# Altium PCB PCB1.PcbDoc
Units mm, origin at the board's own origin, x right, y up, seen from the top; angles counter-clockwise.
Board outline 152.4 x 101.6 mm, 4 copper layers (Top Layer, Int1 (GND), Int2 (PWR), Bottom Layer), stack 1.369 mm thick; 73 components, 38 nets, 237 pads, 0 vias.
Unrouted connection lines stored in the file: 137.
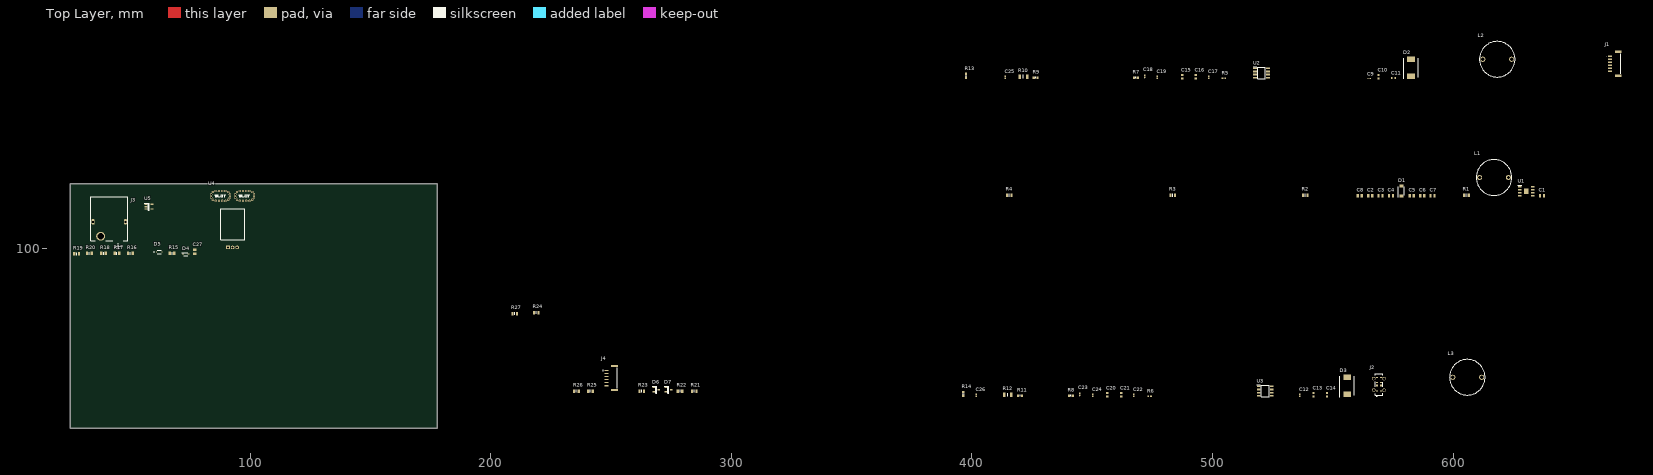
[diagram p0: Top Layer view]
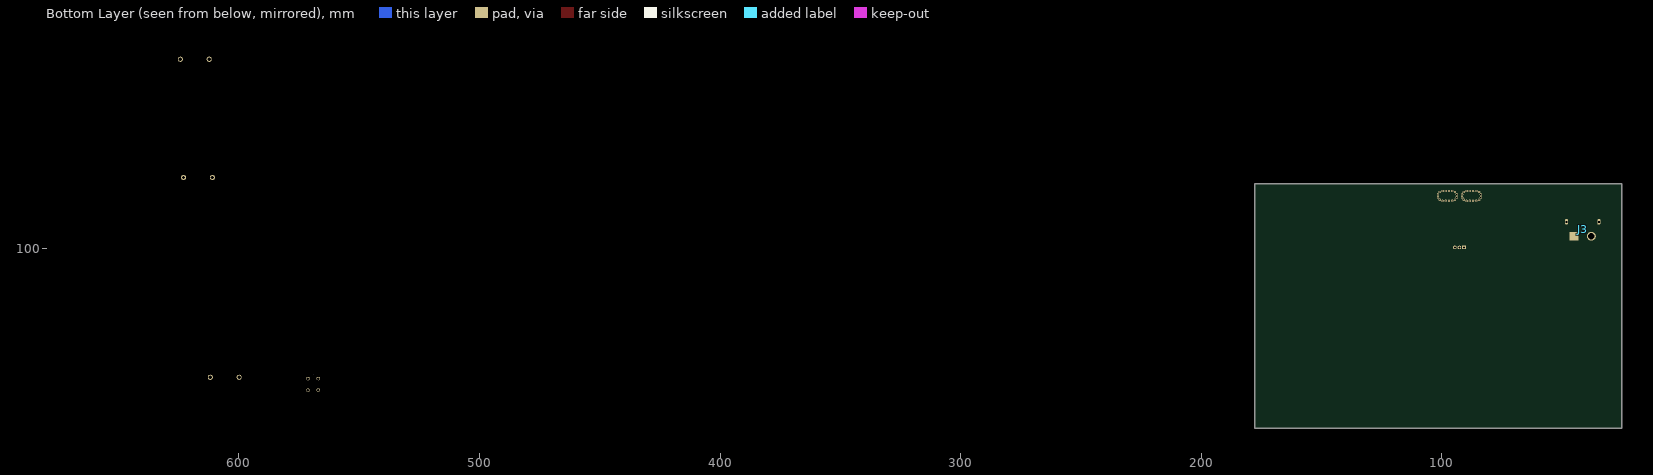
[diagram p1: Bottom Layer view, seen from below]
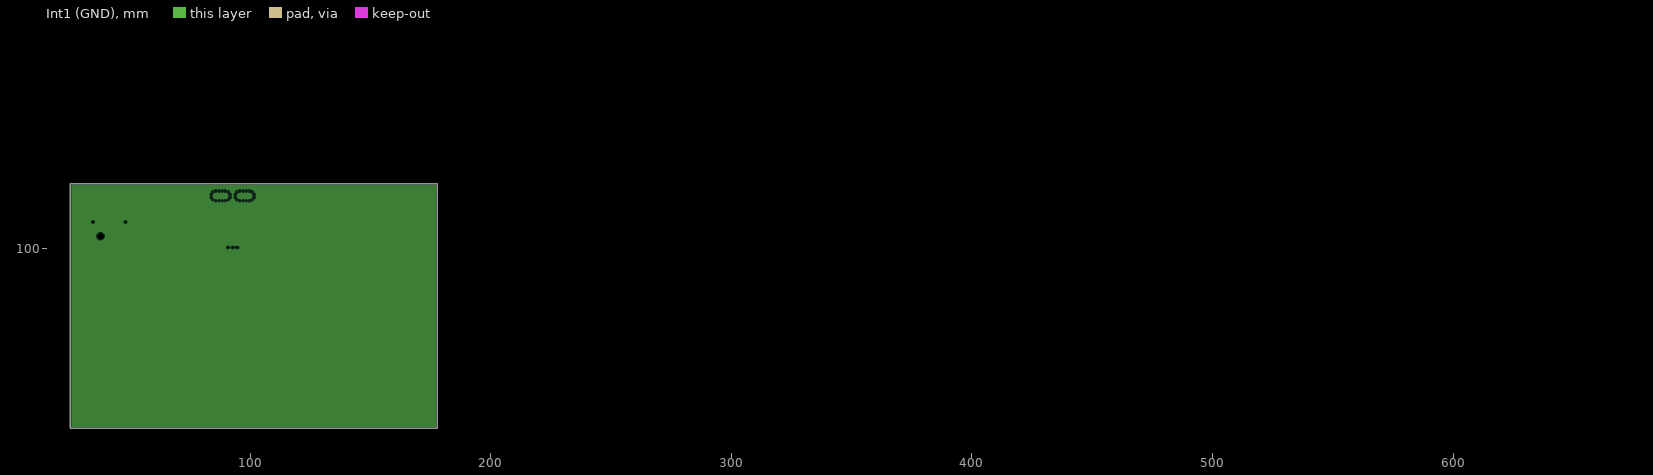
[diagram p2: Int1 (GND), clearances drawn from the general rule]
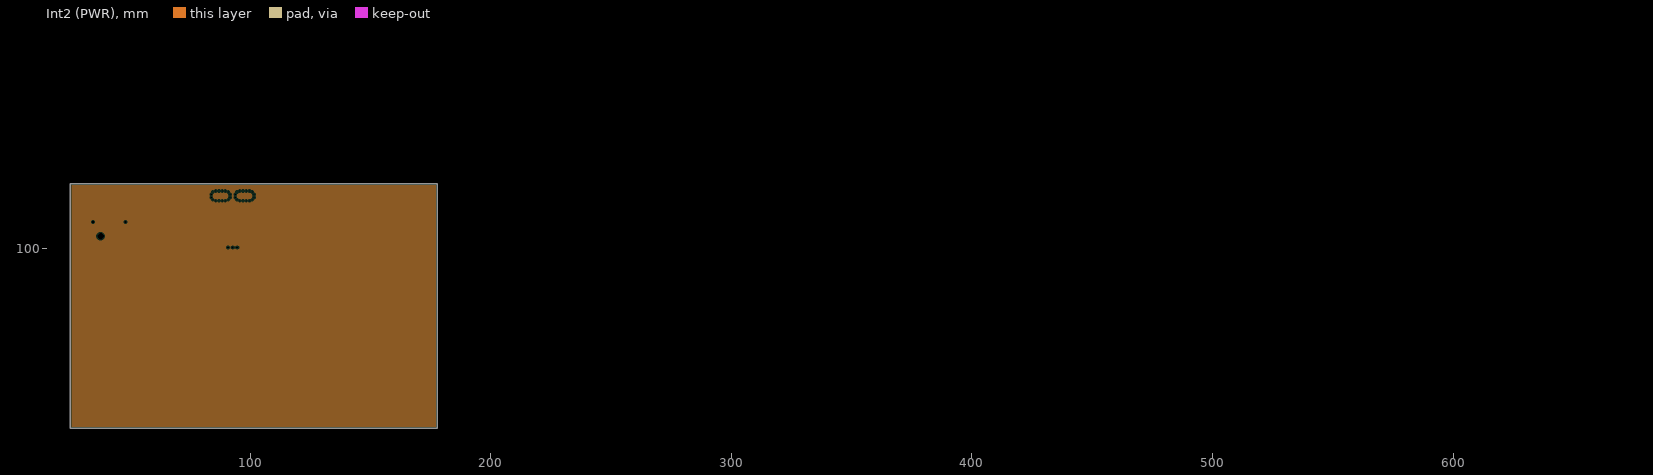
[diagram p3: Int2 (PWR), clearances drawn from the general rule]

## Layer stack, top to bottom
Top Solder: solder mask 0.0254, SM-001, Dk 4
Top Layer: signal copper 0.035
Dielectric 1: prepreg 0.1295, PP-017, Dk 4.3
Dielectric 2: prepreg 0.1295, PP-017, Dk 4.3
Int1 (GND): plane copper 0.035
Dielectric 3: core 0.7112, Core-039, Dk 4.8
Int2 (PWR): plane copper 0.035
Dielectric 4: prepreg 0.1295, PP-017, Dk 4.3
Dielectric 5: prepreg 0.1295, PP-017, Dk 4.3
Bottom Layer: signal copper 0.035
Bottom Solder: solder mask 0.0254, SM-001, Dk 4

## Board outline
25.4,25.4 177.8,25.4 177.8,127 25.4,127

## Design rules (kind name [scope] priority, off if disabled: settings)
Clearance [All] p1: gap=0.254 ignorepadtopadclearanceinfootprint=FALSE
PlaneClearance [All] p1: clearance=0.508
PlaneConnect [All] p1: planeconnectstyle=Relief reliefexpansion=0.508 reliefentries=4 reliefconductorwidth=0.254 reliefairgap=0.254
PolygonConnect [All] p1: connectstyle=Relief reliefconductorwidth=0.254 reliefentries=4 polygonreliefangle="90 Angle" airgapwidth=0.254
RoomDefinition MC [InComponentClass('MC')] p1: confinementstyle=ConfineIn formatcopy=TRUE lockcomponents=FALSE outline 25.801,96.84 120.543,96.84 120.543,126.558 25.801,126.558
RoomDefinition MesureTension [InComponentClass('MesureTension')] p2: confinementstyle=ConfineIn formatcopy=TRUE lockcomponents=FALSE outline 208.026,71.755 221.869,71.755 221.869,84.328 208.026,84.328
RoomDefinition Connexions [InComponentClass('Connexions')] p3: confinementstyle=ConfineIn formatcopy=TRUE lockcomponents=FALSE outline 233.723,42.479 287.19,42.479 287.19,58.481 233.723,58.481
RoomDefinition RaspberryPI [InComponentClass('RaspberryPI')] p4: confinementstyle=ConfineIn formatcopy=TRUE lockcomponents=FALSE outline 395.351,38.029 614.426,38.029 614.426,57.841 395.351,57.841
RoomDefinition PowerModule [InComponentClass('PowerModule')] p5: confinementstyle=ConfineIn formatcopy=TRUE lockcomponents=FALSE outline 413.573,121.031 638.49,121.031 638.49,140.843 413.573,140.843
RoomDefinition ServoMoteur [InComponentClass('ServoMoteur')] p6: confinementstyle=ConfineIn formatcopy=TRUE lockcomponents=FALSE outline 396.494,170.18 671.195,170.18 671.195,189.992 396.494,189.992
RoutingVias [All] p1: holewidth=0.711 width=1.27 viastyle="Through Hole" minholewidth=0.711 minwidth=1.27 maxholewidth=0.711 maxwidth=1.27
SolderMaskExpansion [All] p1: expansion=0.102 istentingtop=FALSE
SupplyNets "Schematic Supply Nets_2" [InNet('+5V PIXHAWK')] p1: voltage=0.000
SupplyNets "Schematic Supply Nets_1" [InNet('+22.2V BATTERY')] p2: voltage=0.000
SupplyNets "Schematic Supply Nets" [InNet('GND')] p3: voltage=0.000
Width [All] p1: maxlimit=0.254 minlimit=0.254 preferedwidth=0.254
28 further rules are at their usual default settings.

## Classes and differential pairs
component class ServoMoteur: C9 C10 C11 C15 C16 C17 C18 C19 C25 D2 J1 L2 R5 R7 R9 R10 R13 U2
component class RaspberryPI: C12 C13 C14 C20 C21 C22 C23 C24 C26 D3 J2 L3 R6 R8 R11 R12 R14 U3
component class PowerModule: C1 C2 C3 C4 C5 C6 C7 C8 D1 L1 R1 R2 R3 R4 U1
component class MesureTension: R24 R27
component class MC: C27 CS1 D4 D5 J3 R15 R16 R17 R18 R19 R20 U4 U5
component class Connexions: D6 D7 IC1 J4 R21 R22 R23 R25 R26

## Components (designator, comment, footprint, x,y, rotation, side; value= is the part's Value field where it differs from the comment)
C1 "0.1uF" CAPC2012X145N 636.839,122.174 r0 top
C2 "47uF 10V" CAPC2012X145N 565.465,122.174 r0 top
C3 "47uF 10V" CAPC2012X145N 569.783,122.174 r0 top
C4 "47uF 10V" CAPC2012X145N 574.101,122.174 r0 top
C5 "10uF 35V" CAPC2012X145N 582.737,122.174 r0 top
C6 "10uF 35V" CAPC2012X145N 587.055,122.174 r0 top
C7 "0.1uF" CAPC2012X145N 591.373,122.174 r0 top
C8 "10nF" CAPC2012X145N 561.147,122.174 r0 top
C9 "10nF" CAPC1005X70N 565.023,170.815 r0 top
C10 "4.7uF" CAPC1608X90N 568.96,171.577 r90 top
C11 "4.7uF" CAPC1608X90N 575.183,171.069 r0 top
C12 "10nF" CAPC1005X70N 536.194,39.172 r90 top
C13 "4.7uF" CAPC1608X90N 541.909,39.426 r90 top
C14 "4.7uF" CAPC1608X90N 547.497,39.426 r90 top
C15 "4.7uF" CAPC1608X90N 487.426,171.577 r90 top
C16 "4.7uF" CAPC1608X90N 493.014,171.577 r90 top
C17 "10nF" CAPC1005X70N 498.475,171.323 r90 top
C18 "470pF" C0402C104J4RACTU 471.805,171.704 r90 top
C19 "4.5pF" CAPC1005X55N 477.012,171.323 r90 top
C20 "4.7uF" CAPC1608X90N 456.184,39.426 r90 top
C21 "4.7uF" CAPC1608X90N 462.026,39.426 r90 top
C22 "10nF" CAPC1005X70N 467.233,39.172 r90 top
C23 "470pF" C0402C104J4RACTU 444.754,39.553 r90 top
C24 "4.5pF" CAPC1005X55N 450.215,39.172 r90 top
C25 "10nF" CAPC1005X70N 413.766,171.323 r90 top
C26 "10nF" CAPC1005X70N 401.701,39.172 r90 top
C27 "0.1uF" CAPC2012X145N 76.962,98.806 r90 top
D1 "60V" SODFL4725X105N 578.419,124.079 r90 top
D2 "CDBC540-G" DIOM8059X290N 582.422,175.26 r90 top
D3 "CDBC540-G" DIOM8059X290N 555.879,43.109 r90 top
D4 "60V" SODFL2512X80N 73.299,97.856 r0 top
D5 "SD15C-01FTG" SD15C01FTG 62.25,98.745 r0 top
D6 "BAT54S,215" SOT95P230X110-3N 268.775,41.529 r0 top
D7 "BAT54S,215" SOT95P230X110-3N 273.855,41.529 r0 top
J1 "BM06B-GHS-TBT_LF__SN_" BM06BGHSTBTLFSN 667.385,176.911 r90 top
J2 "USB4120-03-C" USB412003C 569.087,43.744 r90 top
J3 "XT60PW-M" AMASS_XT60PW-M 41.529,111.252 r0 top
J4 "BM06B-GHS-TBT_LF__SN_" BM06BGHSTBTLFSN 250.36,46.355 r90 top
L1 "22mH" 744750560220 610.931,129.667 r0 top
L2 "22mH" 744750560220 612.267,178.816 r0 top
L3 "22mH" 744750560220 599.821,46.665 r0 top
R1 "10k" RESC2012X60N 605.47,122.301 r0 top
R2 "160k" RESC2012X60N 538.541,122.301 r0 top
R3 "4.7k" RESC2012X60N 483.423,122.301 r0 top
R4 "30k" RESC2012X60N 415.478,122.301 r0 top
R5 "6.65M" RESC1005X40N 504.698,170.942 r0 top
R6 "6.65M" RESC1005X40N 473.837,38.791 r0 top
R7 "20k" RESC1608X55N 468.122,171.196 r0 top
R8 "20k" RESC1608X55N 441.071,39.045 r0 top
R9 "174k" RESC1608X55N 426.466,171.196 r0 top
R10 "287k" RESC3216X60N 421.386,171.577 r0 top
R11 "174k" RESC1608X55N 419.989,39.045 r0 top
R12 "287k" RESC3216X60N 414.909,39.426 r0 top
R13 "20k" RESC1608X55N 397.51,171.958 r90 top
R14 "20k" RESC1608X55N 396.367,39.807 r90 top
R15 "10k" RESC2012X60N 67.584,98.11 r0 top
R16 "10k" RESC2012X60N 50.312,98.11 r0 top
R17 "10k" RESC2012X60N 44.724,98.11 r0 top
R18 "10k" RESC2012X60N 39.136,98.11 r0 top
R19 "2k" RESC2012X60N 27.94,97.917 r0 top
R20 "18k" RESC2012X50N 33.294,98.11 r0 top
R21 "806" RESC2012X60N 284.65,40.894 r0 top
R22 "750" RESC2012X60N 278.681,40.894 r0 top
R23 "2.49k" RESC2012X60N 262.806,40.894 r0 top
R24 "20k" RESC2012X60N 218.948,73.533 r0 top
R25 "100" RESC2012X60N 241.47,40.894 r0 top
R26 "100" RESC2012X60N 235.628,40.894 r0 top
R27 "1.6K" RESC2012X60N 209.992,73.152 r0 top
U1 "BD9G401EFJ-ME2" SOIC127P600X100-9N 630.362,123.952 r0 top
U2 "TPS54531DDAR" SOIC127P600X175-8N 520.319,173.101 r0 top
U3 "TPS54531DDAR" SOIC127P600X175-8N 521.843,40.95 r0 top
U4 "ACS770KCB-150U-PFF-T" ACS772ECB200BPFFT 90.848,100.614 r0 top
U5 "LM321SN3T1G" SOT95P275X110-5N 57.932,117.541 r0 top

## Footprints (in the part's own frame and the unit in brackets; to place one, negate y for a bottom-side part, rotate by r counter-clockwise, add the part's x,y. Pads: shape width x height; smd on the part's side, far side on the other; paste and mask are expansions set on the pad)
744750560220 [mm]
  round 2.1 hole 1.4: 1(0,0) 2(12,0)
  silkscreen extent -1.4,-7.4 13.4,7.4, body extent -1.4,-7.4 13.4,7.4, height 15.9
ACS772ECB200BPFFT [mm]
  rect 1.5x1.5 hole 0.8: 1(0,0)
  round 1.5 hole 0.8: 2(1.91,0) 3(3.82,0)
  round 1 hole 0.5: 4(3.008,22.018) 5(0.812,22.018) 6(0.812,20.782) 7(0.086,19.782) 8(-1.09,19.35) 9(-2.423,19.35) 10(-3.757,19.35) 11(-5.09,19.35) 12(-6.266,19.782) 13(-6.992,20.782) 14(-6.992,22.018) 15(-6.266,23.018) 16(-5.09,23.45) 17(-3.757,23.45) 18(-2.423,23.45) 19(-1.09,23.45) 20(0.086,23.018) 21(3.008,20.782) 22(3.734,19.782) 23(4.91,19.35) 24(6.243,19.35) 25(7.577,19.35) 26(8.91,19.35) 27(10.086,19.782) 28(10.812,20.782) 29(10.812,22.018) 30(10.086,23.018) 31(8.91,23.45) 32(7.577,23.45) 33(6.243,23.45) 34(4.91,23.45) 35(3.734,23.018)
  silkscreen extent -5.39,3.1 9.11,21.9, body extent -5.06,-0.48 8.94,22.33, height 6.97
AMASS_XT60PW-M [mm]
  rect 3.716x3.716 smd far side: 1(3.6,-6)
  round 3.716 hole 2.7: 2(-3.6,-6)
  oval 1.2x2.4 hole 0.6 square: S1(6.75,0) S2(-6.75,0)
  silkscreen extent -7.75,-11.43 7.75,10.35, body extent -7.75,-7.85 7.75,10.35, height 8.4
BM06BGHSTBTLFSN [mm]
  rect 0.6x1.7 smd: 1(3.125,2.225) 2(1.875,2.225) 3(0.625,2.225) 4(-0.625,2.225) 5(-1.875,2.225) 6(-3.125,2.225)
  rect 1x2.8 smd: MP1(4.975,-1.125) MP2(-4.975,-1.125)
  silkscreen extent -4.2,-2.22 4.2,3.7, body extent -5.37,-2.24 5.38,2.71, height 4.21
C0402C104J4RACTU [mm]
  rect 0.62x0.62 smd: 1(-0.45,0) 2(0.45,0)
  silkscreen extent -1.05,-0.05 -0.95,0.05, body extent -0.52,-0.28 0.53,0.27, height 0.55
CAPC1005X55N [mm]
  rect 0.6x0.62 smd: 1(-0.46,0) 2(0.46,0)
  body extent -0.5,-0.25 0.5,0.25, height 0.55
CAPC1005X70N [mm]
  rect 0.6x0.62 smd: 1(-0.46,0) 2(0.46,0)
  body extent -0.5,-0.25 0.5,0.25, height 0.5
CAPC1608X90N [mm]
  rect 0.73x0.94 smd: 1(-0.71,0) 2(0.71,0)
  body extent -0.8,-0.4 0.8,0.4, height 0.9
CAPC2012X145N [mm]
  rect 0.97x1.47 smd: 1(-0.83,0) 2(0.83,0)
  body extent -1,-0.63 1,0.63, height 1.45
DIOM8059X290N [mm]
  rect 2.3x3.15 smd: 1(-3.5,0) 2(3.5,0)
  silkscreen extent -4.65,-2.95 4,2.95, body extent -4,-2.95 4,2.95, height 2.9
RESC1005X40N [mm]
  rect 0.75x0.6 smd: 1(-0.55,0) 2(0.55,0)
  body extent -0.5,-0.25 0.5,0.25, height 0.35
RESC1608X55N [mm]
  rect 0.9x1 smd: 1(-0.8,0) 2(0.8,0)
  silkscreen extent 0,-0.33 0,0.33, body extent -0.8,-0.4 0.8,0.4, height 0.45
RESC2012X50N [mm]
  rect 0.95x1.45 smd: 1(-1,0) 2(1,0)
  silkscreen extent 0,-0.53 0,0.53, body extent -1.02,-0.63 1.02,0.63, height 0.5
RESC2012X60N [mm]
  rect 0.9x1.45 smd: 1(-0.95,0) 2(0.95,0)
  silkscreen extent 0,-0.53 0,0.53, body extent -1,-0.63 1,0.63, height 0.6
RESC3216X60N [mm]
  rect 1.05x1.8 smd: 1(-1.5,0) 2(1.5,0)
  silkscreen extent 0,-0.7 0,0.7, body extent -1.42,-0.74 1.78,0.86, height 0.55
SD15C01FTG [mm]
  rect 0.49x0.45 smd: 1(-1.14,0) 2(1.14,0)
  silkscreen extent -2.2,-0.65 0.87,0.65, body extent -1.31,-0.65 1.31,0.65, height 1
SODFL2512X80N [mm]
  rect 0.84x0.46 smd: 1(-1.15,0) 2(1.15,0)
  silkscreen extent -1.57,-0.63 0.85,0.63, body extent -1.25,-0.63 1.25,0.62, height 0.71
SODFL4725X105N [mm]
  rect 1.12x1.72 smd: 1(-2.075,0) 2(2.075,0)
  silkscreen extent -2.64,-1.25 1.85,1.25, body extent -2.35,0 2.35,0.95, height 1.25
SOIC127P600X100-9N [mm]
  rect 1.525x0.7 smd: 1(-2.712,1.905) 2(-2.712,0.635) 3(-2.712,-0.635) 4(-2.712,-1.905) 5(2.712,-1.905) 6(2.712,-0.635) 7(2.712,0.635) 8(2.712,1.905)
  rect 1.8x2.2 smd: 9(0,0)
  silkscreen extent -3.47,2.61 -1.95,2.61, body extent -3,-2.45 3,2.45, height 1
SOIC127P600X175-8N [mm]
  rect 1.525x0.65 smd: 1(-2.712,1.905) 2(-2.712,0.635) 3(-2.712,-0.635) 4(-2.712,-1.905) 5(2.712,-1.905) 6(2.712,-0.635) 7(2.712,0.635) 8(2.712,1.905)
  silkscreen extent -3.47,-2.45 1.6,2.58, body extent -3,-2.45 3,2.45, height 1.75
SOT95P230X110-3N [mm]
  rect 1.05x0.6 smd: 1(-1.1,0.95) 2(-1.1,-0.95) 3(1.1,0)
  silkscreen extent -1.63,-1.45 0.23,1.5, body extent -1.2,-1.45 1.2,1.45, height 0.95
SOT95P275X110-5N [mm]
  rect 1.25x0.6 smd: 1(-1.25,0.95) 2(-1.25,0) 3(-1.25,-0.95) 4(1.25,-0.95) 5(1.25,0.95)
  silkscreen extent -1.88,-1.5 0.28,1.5, body extent -1.38,-1.5 1.38,1.5, height 1.1
USB412003C [mm]
  rect 0.3x0.87 smd: A1(-2.75,0.865) A4(-1.25,0.865) A5(-0.75,0.865) A6(-0.25,0.865) A7(0.25,0.865) A8(0.75,0.865) A9(1.25,0.865) A12(2.75,0.865) B1(2.75,-0.865) B4(1.25,-0.865) B5(0.75,-0.865) B6(0.25,-0.865) B7(-0.25,-0.865) B8(-0.75,-0.865) B9(-1.25,-0.865) B12(-2.75,-0.865)
  round 1.46 hole 1.04: MH1(-2.4,2.15) MH2(2.4,2.15) MH3(2.4,-2.15) MH4(-2.4,-2.15)
  round 0.26 hole 0.52 unplated: MH5(-3.75,0)
  round 0.445 hole 0.89 unplated: MH6(3.75,0)
  silkscreen extent -5.1,-1.58 4.47,1.58, body extent -4.47,-2.3 4.47,2.3, height 6.5

## Part data
C1 C7 C27: library part C2012X7R2A104K125AA, "Capacitor", Manufacturer_Name=TDK, Mouser Part Number=810-C2012X7R2A104K, Arrow Part Number=C2012X7R2A104K125AA, Arrow Price/Stock=https://www.arrow.com/en/products/c2012x7r2a104k125aa/tdk?region=europe, Datasheet Link=https://product.tdk.com/info/en/catalog/datasheets/mlcc_commercial_midvoltage_en.pdf, Height=1.45mm, Manufacturer_Part_Number=C2012X7R2A104K125AA, Mouser Price/Stock=https://www.mouser.co.uk/ProductDetail/TDK/C2012X7R2A104K125AA?qs=NRhsANhppD9J0ZsT2%2Fo%2F7Q%3D%3D
  C1 C7: ClassName=PowerModule
  C27: ClassName=MC
C2 C3 C4: library part C2012X5R1A476M125AC, "Capacitor", Manufacturer_Name=TDK, Mouser Part Number=810-C2012X5R1A476M, Arrow Part Number=C2012X5R1A476M125AC, Arrow Price/Stock=https://www.arrow.com/en/products/c2012x5r1a476m125ac/tdk?region=nac, ClassName=PowerModule, Datasheet Link=https://product.tdk.com/info/en/catalog/datasheets/mlcc_commercial_midvoltage_en.pdf, Height=1.45mm, Manufacturer_Part_Number=C2012X5R1A476M125AC, Mouser Price/Stock=https://www.mouser.co.uk/ProductDetail/TDK/C2012X5R1A476M125AC?qs=LcTL%2F5vFEzGyFw5hxP%2FMXw%3D%3D
C5 C6: library part C2012X5R1V106K125AC, "Capacitor", Manufacturer_Name=TDK, Mouser Part Number=810-C2012X5R1V106K1C, Arrow Part Number=C2012X5R1V106K125AC, Arrow Price/Stock=https://www.arrow.com/en/products/c2012x5r1v106k125ac/tdk?region=europe, ClassName=PowerModule, Datasheet Link=https://product.tdk.com/info/en/catalog/datasheets/mlcc_commercial_midvoltage_en.pdf, Height=1.45mm, Manufacturer_Part_Number=C2012X5R1V106K125AC, Mouser Price/Stock=https://www.mouser.co.uk/ProductDetail/TDK/C2012X5R1V106K125AC?qs=6JAMGB%252BEdkwcwonKbQLeCg%3D%3D
C8: library part C2012X7R2E103K125AA, "Capacitor", Manufacturer_Name=TDK, Mouser Part Number=810-C2012X7R2E103K, Arrow Part Number=C2012X7R2E103K125AA, Arrow Price/Stock=https://www.arrow.com/en/products/c2012x7r2e103k125aa/tdk?region=nac, ClassName=PowerModule, Datasheet Link=https://product.tdk.com/info/en/catalog/datasheets/mlcc_commercial_midvoltage_en.pdf, Height=1.45mm, Manufacturer_Part_Number=C2012X7R2E103K125AA, Mouser Price/Stock=https://www.mouser.co.uk/ProductDetail/TDK/C2012X7R2E103K125AA?qs=NRhsANhppD%2FvPjIeAxskbg%3D%3D
C9 C12 C17 C22 C25 C26: library part GRM155R71C103KA01D, "Capacitor", Manufacturer_Name="Murata Electronics", Mouser Part Number=81-GRM36X103K16, Arrow Part Number=GRM155R71C103KA01D, Arrow Price/Stock=https://www.arrow.com/en/products/grm155r71c103ka01d/murata-manufacturing?utm_currency=USD&region=nac, Datasheet Link=https://search.murata.co.jp/Ceramy/image/img/A01X/G101/ENG/GRM155R71C103KA01-01A.pdf, Height=0.7mm, Manufacturer_Part_Number=GRM155R71C103KA01D, Mouser Price/Stock=https://www.mouser.co.uk/ProductDetail/Murata-Electronics/GRM155R71C103KA01D?qs=8YPuuxuUzMI%252B9QLnzeLwhQ%3D%3D
  C9 C17 C25: ClassName=ServoMoteur
  C12 C22 C26: ClassName=RaspberryPI
C10 C11 C13 C14 C15 C16 C20 C21: library part CL10A475KP8NNNC, "Capacitor", Manufacturer_Name=SAMSUNG, Mouser Part Number=187-CL10A475KP8NNNC, Arrow Part Number=CL10A475KP8NNNC, Arrow Price/Stock=https://www.arrow.com/en/products/cl10a475kp8nnnc/samsung-electro-mechanics?region=nac, Datasheet Link=https://www.arrow.com/en/products/cl10a475kp8nnnc/samsung-electro-mechanics, Height=0.9mm, Manufacturer_Part_Number=CL10A475KP8NNNC, Mouser Price/Stock=https://www.mouser.co.uk/ProductDetail/Samsung-Electro-Mechanics/CL10A475KP8NNNC?qs=hqM3L16%252BxlfQRmkWsZz5vA%3D%3D
  C10 C11 C15 C16: ClassName=ServoMoteur
  C13 C14 C20 C21: ClassName=RaspberryPI
C18 C23: library part C0402C471J5GACTU, "Capacitor", Manufacturer_Name=KEMET, Mouser Part Number=80-C0402C471J5G, Arrow Part Number=C0402C471J5GACTU, Arrow Price/Stock=https://www.arrow.com/en/products/c0402c471j5gactu/kemet-corporation, Datasheet Link=https://content.kemet.com/datasheets/KEM_C1002_X7R_SMD.pdf, Height=0.55mm, Manufacturer_Part_Number=C0402C471J5GACTU, Mouser Price/Stock=https://www.mouser.com/Search/Refine.aspx?Keyword=80-C0402C471J5G
  C18: ClassName=ServoMoteur
  C23: ClassName=RaspberryPI
C19 C24: library part GJM1555C1H4R6BB01D, "Capacitor", Manufacturer_Name="Murata Electronics", Datasheet Link=https://search.murata.co.jp/Ceramy/image/img/A01X/G101/ENG/GJM1555C1H4R6BB01-01A.pdf, Height=0.55mm, Manufacturer_Part_Number=GJM1555C1H4R6BB01D
  C19: ClassName=ServoMoteur
  C24: ClassName=RaspberryPI
D1: library part RBR5LAM60ATFTR, "Schottky Diode", Manufacturer_Name="ROHM Semiconductor", Mouser Part Number=755-RBR5LAM60ATFTR, ClassName=PowerModule, Datasheet Link=https://fscdn.rohm.com/en/products/databook/datasheet/discrete/diode/schottky_barrier/rbr5lam60atftr-e.pdf, Height=1.05mm, Manufacturer_Part_Number=RBR5LAM60ATFTR, Mouser Price/Stock=https://www.mouser.co.uk/ProductDetail/ROHM-Semiconductor/RBR5LAM60ATFTR?qs=4v%252BiZTmLVHGKJkO8tMW4zA%3D%3D
D2 D3: "Diode", Manufacturer_Name="Comchip Technology", Mouser Part Number=750-CDBC540-G, Arrow Part Number=CDBC540-G, Arrow Price/Stock=https://www.arrow.com/en/products/cdbc540-g/comchip-technology?utm_currency=USD&region=nac, Datasheet Link=https://eu.mouser.com/datasheet/2/80/CDBC520-HF_Thru195340._CDBC5100-HF_RevB-1480991.pdf, Height=2.9mm, Manufacturer_Part_Number=CDBC540-G, Mouser Price/Stock=https://www.mouser.co.uk/ProductDetail/Comchip-Technology/CDBC540-G?qs=tw%252BuQ%2FB6PO2ExpPYY64Vzw%3D%3D
  D2: ClassName=ServoMoteur
  D3: ClassName=RaspberryPI
D4: library part PMEG6010CEJ,115, "Diode", Manufacturer_Name=Nexperia, Mouser Part Number=771-PMEG6010CEJ-T/R, Arrow Part Number=PMEG6010CEJ,115, Arrow Price/Stock=https://www.arrow.com/en/products/pmeg6010cej115/nexperia?region=nac, ClassName=MC, Datasheet Link=https://assets.nexperia.com/documents/data-sheet/PMEG6010CEH_PMEG6010CEJ.pdf, Height=0.8mm, Manufacturer_Part_Number=PMEG6010CEJ,115, Mouser Price/Stock=https://www.mouser.co.uk/ProductDetail/Nexperia/PMEG6010CEJ115?qs=LOCUfHb8d9sJWWkUvN790w%3D%3D
D5: "TVS Diode (Bi-directional)", Manufacturer_Name=LITTELFUSE, Mouser Part Number=576-SD15C-01FTG, Arrow Part Number=SD15C-01FTG, Arrow Price/Stock=https://www.arrow.com/en/products/sd15c-01ftg/littelfuse?region=nac, ClassName=MC, Datasheet Link=https://www.arrow.com/en/products/sd15c-01ftg/littelfuse, Height=1.14mm, Manufacturer_Part_Number=SD15C-01FTG, Mouser Price/Stock=https://www.mouser.co.uk/ProductDetail/Littelfuse/SD15C-01FTG?qs=4zl93aaztU8pjSvpxpJP6g%3D%3D
D6 D7: "Schottky Diode", Manufacturer_Name=Nexperia, Mouser Part Number=771-BAT54S-T/R, Arrow Part Number=BAT54S,215, Arrow Price/Stock=https://www.arrow.com/en/products/bat54s215/nexperia?utm_currency=USD&region=europe, ClassName=Connexions, Datasheet Link=https://assets.nexperia.com/documents/data-sheet/BAT54S.pdf, Height=1.1mm, Manufacturer_Part_Number=BAT54S,215, Mouser Price/Stock=https://www.mouser.co.uk/ProductDetail/Nexperia/BAT54S215?qs=me8TqzrmIYVOaf3j7zH0Wg%3D%3D
J1 J4: "Connector", Manufacturer_Name="JST (JAPAN SOLDERLESS TERMINALS)", Manufacturer_Part_Number=BM06B-GHS-TBT(LF)(SN), Mouser Part Number=306-BM06BGHSTBTLFSNN, Datasheet Link=https://datasheet.lcsc.com/szlcsc/2004111131_JST-Sales-America-BM06B-GHS-TBT-LF-SN_C495534.pdf, Height=4.05mm, Mouser Price/Stock=https://www.mouser.co.uk/ProductDetail/JST-Commercial/BM06B-GHS-TBTLFSN?qs=cdbOS8ANM9CObKjnhD04mw%3D%3D
  J1: ClassName=ServoMoteur
  J4: ClassName=Connexions
J2: "Connector", Manufacturer_Name="GCT (GLOBAL CONNECTOR TECHNOLOGY)", Mouser Part Number=640-USB4120-03-C, ClassName=RaspberryPI, Datasheet Link=https://gct.co/connector/usb4120, Height=6.75mm, Manufacturer_Part_Number=USB4120-03-C, Mouser Price/Stock=https://www.mouser.co.uk/ProductDetail/GCT/USB4120-03-C?qs=KUoIvG%2F9IlZaAd13sVDhkQ%3D%3D
J3: "Socket, DC supply, male, PIN: 2", Package=Package, Availability="Not in stock", Check_prices=https://www.snapeda.com/parts/XT60PW-M/AMASS/view-part/?ref=eda, ClassName=MC, MF=AMASS, MP=XT60PW-M, Price=None, SnapEDA_Link=https://www.snapeda.com/parts/XT60PW-M/AMASS/view-part/?ref=snap
L1 L2 L3: library part 744750560220, "Inductor", Manufacturer_Name="Wurth Elektronik", Mouser Part Number=710-744750560220, Datasheet Link=https://componentsearchengine.com/Datasheets/2/744750560220.pdf, Height=15.8mm, Manufacturer_Part_Number=744750560220, Mouser Price/Stock=https://www.mouser.co.uk/ProductDetail/Wurth-Elektronik/744750560220?qs=HXx4m3XcTe10itAwD7FiZQ%3D%3D
  L1: ClassName=PowerModule
  L2: ClassName=ServoMoteur
  L3: ClassName=RaspberryPI
R1 R15 R16 R17 R18: library part CRCW080510K0FKEAHP, "Resistor", Manufacturer_Name=Vishay, Mouser Part Number=71-CRCW080510K0FKEAH, Arrow Part Number=CRCW080510K0FKEAHP, Arrow Price/Stock=https://www.arrow.com/en/products/crcw080510k0fkeahp/vishay?utm_currency=USD&region=europe, Datasheet Link=https://componentsearchengine.com/Datasheets/1/CRCW08051R00FKEAHP.pdf, Height=0.6mm, Manufacturer_Part_Number=CRCW080510K0FKEAHP, Mouser Price/Stock=https://www.mouser.co.uk/ProductDetail/Vishay-Dale/CRCW080510K0FKEAHP?qs=FlFvgi4rxBybVOW6oiRQjA%3D%3D
  R1: ClassName=PowerModule
  R15 R16 R17 R18: ClassName=MC
R2: library part CRCW0805160KFKEAHP, "Resistor", Manufacturer_Name=Vishay, ClassName=PowerModule, Datasheet Link=https://componentsearchengine.com/Datasheets/1/CRCW08051R00FKEAHP.pdf, Height=0.6mm, Manufacturer_Part_Number=CRCW0805160KFKEAHP
R3: library part CRCW08054K70FKEAC, "Resistor", Manufacturer_Name=Vishay, Mouser Part Number=71-CRCW08054K70FKEAC, Arrow Part Number=CRCW08054K70FKEAC, Arrow Price/Stock=https://www.arrow.com/en/products/crcw08054k70fkeac/vishay?region=nac, ClassName=PowerModule, Datasheet Link=https://mouser.componentsearchengine.com/Datasheets/1/CRCW08054K70FKEAC.pdf, Height=0.6mm, Manufacturer_Part_Number=CRCW08054K70FKEAC, Mouser Price/Stock=https://www.mouser.co.uk/ProductDetail/Vishay-Dale/CRCW08054K70FKEAC?qs=E3Y5ESvWgWOQAAVugewEHA%3D%3D
R4: library part CRCW080530K0FKEAC, "Resistor", Manufacturer_Name=Vishay, Mouser Part Number=71-CRCW080530K0FKEAC, Arrow Part Number=CRCW080530K0FKEAC, Arrow Price/Stock=https://www.arrow.com/en/products/crcw080530k0fkeac/vishay?region=nac, ClassName=PowerModule, Datasheet Link=https://mouser.componentsearchengine.com/Datasheets/1/CRCW080530K0FKEAC.pdf, Height=0.6mm, Manufacturer_Part_Number=CRCW080530K0FKEAC, Mouser Price/Stock=https://www.mouser.co.uk/ProductDetail/Vishay-Dale/CRCW080530K0FKEAC?qs=E3Y5ESvWgWMYq9MgiyaMow%3D%3D
R5 R6: library part CRCW04026M65FKED, "Resistor", Manufacturer_Name=Vishay, Datasheet Link=http://www.vishay.com/docs/20035/dcrcwe3.pdf, Height=0.4mm, Manufacturer_Part_Number=CRCW04026M65FKED
  R5: ClassName=ServoMoteur
  R6: ClassName=RaspberryPI
R7 R8 R9 R11 R13 R14: library part RC0603FR-0720KL, "Resistor", Manufacturer_Name=KEMET, Mouser Part Number=603-RC0603FR-0720KL, Arrow Part Number=RC0603FR-0720KL, Arrow Price/Stock=https://www.arrow.com/en/products/rc0603fr-0720kl/yageo, Datasheet Link=http://www.yageo.com/documents/recent/PYu-RC0603_51_RoHS_L_v5.pdf, Height=0.55mm, Manufacturer_Part_Number=RC0603FR-0720KL, Mouser Price/Stock=https://www.mouser.co.uk/ProductDetail/YAGEO/RC0603FR-0720KL?qs=VU8sRB4EgwCsxfrjtEIKPQ%3D%3D
  R7 R9 R13: ClassName=ServoMoteur
  R8 R11 R14: ClassName=RaspberryPI
R10 R12: library part CRCW1206287KFKEA, "Resistor", Manufacturer_Name=Vishay, Mouser Part Number=71-CRCW1206-287K-E3, Height=0.6mm, Manufacturer_Part_Number=CRCW1206287KFKEA, Mouser Price/Stock=https://www.mouser.com/Search/Refine.aspx?Keyword=71-CRCW1206-287K-E3
  R10: ClassName=ServoMoteur
  R12: ClassName=RaspberryPI
R19: library part CRCW08052K00FKEAC, "Resistor", Manufacturer_Name=Vishay, Mouser Part Number=71-CRCW08052K00FKEAC, Arrow Part Number=CRCW08052K00FKEAC, Arrow Price/Stock=https://www.arrow.com/en/products/crcw08052k00fkeac/vishay?utm_currency=USD&region=nac, ClassName=MC, Datasheet Link=http://www.vishay.com/docs/28773/crcwce3.pdf, Height=0.6mm, Manufacturer_Part_Number=CRCW08052K00FKEAC, Mouser Price/Stock=https://www.mouser.co.uk/ProductDetail/Vishay-Dale/CRCW08052K00FKEAC?qs=E3Y5ESvWgWP6floxGsbShA%3D%3D
R20: library part CRCW080518K0FKEAC, "Resistor", Manufacturer_Name=Vishay, Mouser Part Number=71-CRCW080518K0FKEAC, Arrow Part Number=CRCW080518K0FKEAC, Arrow Price/Stock=https://www.arrow.com/en/products/crcw080518k0fkeac/vishay?region=nac, ClassName=MC, Datasheet Link=https://www.arrow.com/en/products/crcw080518k0fkeac/vishay?region=nac, Height=0.5mm, Manufacturer_Part_Number=CRCW080518K0FKEAC, Mouser Price/Stock=https://www.mouser.co.uk/ProductDetail/Vishay-Dale/CRCW080518K0FKEAC?qs=E3Y5ESvWgWPSwNx6fNHotQ%3D%3D
R21: library part CRCW0805806RFKEAHP, "Resistor", Manufacturer_Name=Vishay, ClassName=Connexions, Datasheet Link=https://componentsearchengine.com/Datasheets/1/CRCW08051R00FKEAHP.pdf, Height=0.6mm, Manufacturer_Part_Number=CRCW0805806RFKEAHP
R22: library part CRCW0805750RFKEAHP, "Resistor", Manufacturer_Name=Vishay, Mouser Part Number=71-CRCW0805750RFKEAH, Arrow Part Number=CRCW0805750RFKEAHP, Arrow Price/Stock=https://www.arrow.com/en/products/crcw0805750rfkeahp/vishay?region=nac, ClassName=Connexions, Datasheet Link=https://componentsearchengine.com/Datasheets/1/CRCW08051R00FKEAHP.pdf, Height=0.6mm, Manufacturer_Part_Number=CRCW0805750RFKEAHP, Mouser Price/Stock=https://www.mouser.co.uk/ProductDetail/Vishay-Dale/CRCW0805750RFKEAHP?qs=40TFAHZMFvdp5ouInDDfaw%3D%3D
R23: library part CRCW08052K49FKEAC, "Resistor", Manufacturer_Name=Vishay, Mouser Part Number=71-CRCW08052K49FKEAC, Arrow Part Number=CRCW08052K49FKEAC, Arrow Price/Stock=https://www.arrow.com/en/products/crcw08052k49fkeac/vishay, ClassName=Connexions, Datasheet Link=https://componentsearchengine.com/Datasheets/1/CRCW08052K49FKEAC.pdf, Height=0.5mm, Manufacturer_Part_Number=CRCW08052K49FKEAC, Mouser Price/Stock=https://www.mouser.com/Search/Refine.aspx?Keyword=71-CRCW08052K49FKEAC
R24: library part CRCW080520K0FKEAC, "Resistor", Manufacturer_Name=Vishay, Mouser Part Number=71-CRCW080520K0FKEAC, Arrow Part Number=CRCW080520K0FKEAC, Arrow Price/Stock=https://www.arrow.com/en/products/crcw080520k0fkeac/vishay, ClassName=MesureTension, Datasheet Link=https://mouser.componentsearchengine.com/Datasheets/1/CRCW080520K0FKEAC.pdf, Height=0.6mm, Manufacturer_Part_Number=CRCW080520K0FKEAC, Mouser Price/Stock=https://www.mouser.co.uk/ProductDetail/Vishay-Dale/CRCW080520K0FKEAC?qs=E3Y5ESvWgWNXVYIsIc630g%3D%3D
R25 R26: library part CRCW0805100RFKEA, "Resistor", Manufacturer_Name=Vishay, Mouser Part Number=71-CRCW0805-100-E3, Arrow Part Number=CRCW0805100RFKEA, Arrow Price/Stock=https://www.arrow.com/en/products/crcw0805100rfkea/vishay?utm_currency=USD&region=nac, ClassName=Connexions, Datasheet Link=http://www.vishay.com/docs/20035/dcrcwe3.pdf, Height=0.5mm, Manufacturer_Part_Number=CRCW0805100RFKEA, Mouser Price/Stock=https://www.mouser.co.uk/ProductDetail/Vishay-Dale/CRCW0805100RFKEA?qs=LOX6nxTstiYDPDKmuLyNLw%3D%3D
R27: library part CRCW08051K60FKEAC, "Resistor", Manufacturer_Name=Vishay, Mouser Part Number=71-CRCW08051K60FKEAC, Arrow Part Number=CRCW08051K60FKEAC, Arrow Price/Stock=https://www.arrow.com/en/products/crcw08051k60fkeac/vishay, ClassName=MesureTension, Datasheet Link=https://www.arrow.com/en/products/crcw08051k60fkeac/vishay, Height=0.6mm, Manufacturer_Part_Number=CRCW08051K60FKEAC, Mouser Price/Stock=https://www.mouser.co.uk/ProductDetail/Vishay-Dale/CRCW08051K60FKEAC?qs=E3Y5ESvWgWMJaZYHQus8LQ%3D%3D
U1: "Buck converter", Manufacturer_Name="ROHM Semiconductor", Mouser Part Number=755-BD9G401EFJ-ME2, ClassName=PowerModule, Datasheet Link=https://componentsearchengine.com/Datasheets/1/BD9G401EFJ-ME2.pdf, Height=1mm, Manufacturer_Part_Number=BD9G401EFJ-ME2, Mouser Price/Stock=https://www.mouser.co.uk/ProductDetail/ROHM-Semiconductor/BD9G401EFJ-ME2?qs=HXFqYaX1Q2yXryPBxafgDg%3D%3D
U2 U3: "Power Supply", Manufacturer_Name="Texas Instruments", Mouser Part Number=595-TPS54531DDAR, Arrow Part Number=TPS54531DDAR, Arrow Price/Stock=https://www.arrow.com/en/products/tps54531ddar/texas-instruments?utm_currency=USD&region=nac, Datasheet Link=http://www.ti.com/lit/gpn/tps54531, Height=1.7mm, Manufacturer_Part_Number=TPS54531DDAR, Mouser Price/Stock=https://www.mouser.co.uk/ProductDetail/Texas-Instruments/TPS54531DDAR?qs=jA5Ki6243onykODzUePbag%3D%3D
  U2: ClassName=ServoMoteur
  U3: ClassName=RaspberryPI
U4: "Integrated Circuit", Manufacturer_Name="Allegro Microsystems", Mouser Part Number=250-770KCB150UPFFT, Arrow Part Number=ACS770KCB-150U-PFF-T, Arrow Price/Stock=https://www.arrow.com/en/products/acs770kcb-150u-pff-t/allegro-microsystems?region=nac, ClassName=MC, Datasheet Link=https://www.allegromicro.com/-/media/files/datasheets/acs770-datasheet.ashx, Height=7.1mm, Manufacturer_Part_Number=ACS770KCB-150U-PFF-T, Mouser Price/Stock=https://www.mouser.co.uk/ProductDetail/Allegro-MicroSystems/ACS770KCB-150U-PFF-T?qs=pUKx8fyJudAqqwIwIjrr8g%3D%3D
U5: "Integrated Circuit", Manufacturer_Name=onsemi, Mouser Part Number=863-LM321SN3T1G, Arrow Part Number=LM321SN3T1G, Arrow Price/Stock=https://www.arrow.com/en/products/lm321sn3t1g/on-semiconductor?utm_currency=USD&region=nac, ClassName=MC, Datasheet Link=https://www.onsemi.com/pub/Collateral/LM321-D.PDF, Height=1.1mm, Manufacturer_Part_Number=LM321SN3T1G, Mouser Price/Stock=https://www.mouser.co.uk/ProductDetail/onsemi/LM321SN3T1G?qs=slMPpRTKD5qNVsCzBsHVZA%3D%3D

## Nets (pads, with @x,y where several pads share a name; then routed paths per layer and width w, separated by ;. In a path a pad name is that pad's centre, name@x,y a point inside that pad or via, vN(x,y) a via of type N, cw(c..) or ccw(c..) an arc to the next point about the centre after c; other vN are vias at no path point)
"+5V PIXHAWK": C2.2 C3.2 C4.2 J4.1 J4.2 L1.1 R22.2
"+22.2V BATTERY": C1.2 C5.2 C6.2 C7.2 C15.2 C16.2 C17.2 C20.2 C21.2 C22.2 R1.2 R5.2 R6.2 R24.2 U1.7 U1.8 U2.2 U3.2
GND: C2.1 C3.1 C4.1 C5.1 C6.1 C7.1 C15.1 C16.1 C17.1 C19.1 C20.1 C21.1 C22.1 C24.1 C25.1 C26.1 C27.2 D1.2 D5.2 J1.1 J1.2 J2.A1 J2.A12 J2.B1 J2.B12 J3.2 J4.5 J4.6 R4.1 R9.1 R10.1 R11.1 R12.1 R13.1 R14.1 R16.1 R19.1 R23.1 R27.1 U1.2 U1.5 U1.9 U5.2
NetC1_1: C1.1 D1.1 L1.2 R2.2 U1.1
NetC8_1: C8.1 U1.3
NetC9_1: C9.1 U2.1
NetC9_2: C9.2 D2.1 L2.1 U2.8
NetC10_1: C10.1 C11.1 D2.2 R7.2 U2.7
NetC10_2: C10.2 C11.2 J1.3 J1.4 J1.5 J1.6 L2.2
NetC12_1: C12.1 U3.1
NetC12_2: C12.2 D3.1 L3.1 U3.8
NetC13_1: C13.1 C14.1 D3.2 R8.2 U3.7
NetC13_2: C13.2 C14.2 J2.A4 J2.A9 J2.B4 J2.B9 L3.2
NetC18_1: C18.1 R9.2
NetC18_2: C18.2 C19.2 U2.6
NetC23_1: C23.1 R11.2
NetC23_2: C23.2 C24.2 U3.6
NetC25_2: C25.2 U2.4
NetC26_2: C26.2 U3.4
NetC27_1: C27.1 R20.2 U5.5
NetCS1_1: D4.2 D5.1 J3.1
NetD4_1: D4.1
NetD6_1: D6.1 J4.3 R25.2
NetD6_2: D6.2 D7.2 R21.2 R22.1
NetD7_1: D7.1 J4.4 R26.2
NetIC1_1: R21.1 R23.2
NetR1_1: R1.1 U1.6
NetR2_1: R2.1 R4.2 U1.4
NetR5_1: R5.1 R10.2 U2.3
NetR6_1: R6.1 R12.2 U3.3
NetR7_1: R7.1 R13.2 U2.5
NetR8_1: R8.1 R14.2 U3.5
NetR15_1: R15.1 R16.2 U5.1
NetR15_2: R15.2
NetR17_1: R17.1 R19.2 R20.1
NetR17_2: R17.2 R18.2 U5.3
NetR18_1: R18.1 U5.4
NetR24_1: R24.1 R27.2
pads on no net: C8.2 D6.3 D7.3 J1.MP1 J1.MP2 J2.A5 J2.A6 J2.A7 J2.A8 J2.B5 J2.B6 J2.B7 J2.B8 J2.MH1 J2.MH2 J2.MH3 J2.MH4 J2.MH5 J2.MH6 J3.S1 J3.S2 J4.MP1 J4.MP2 R3.1 R3.2 R25.1 R26.1 U4.1 U4.2 U4.3 U4.4 U4.5 U4.6 U4.7 U4.8 U4.9 U4.10 U4.11 U4.12 U4.13 U4.14 U4.15 U4.16 U4.17 U4.18 U4.19 U4.20 U4.21 U4.22 U4.23 U4.24 U4.25 U4.26 U4.27 U4.28 U4.29 U4.30 U4.31 U4.32 U4.33 U4.34 U4.35

## Polygon pours and split planes (outlines as drawn)
no net on Int1 (GND) (split plane): 177.29,25.91 25.91,25.91 25.91,126.49 177.29,126.49
no net on Int2 (PWR) (split plane): 177.29,25.91 25.91,25.91 25.91,126.49 177.29,126.49